# Altium PCB CORE.PcbDoc
Units mil, origin at the board's own origin, x right, y up, seen from the top; angles counter-clockwise.
Board outline 6000 x 4000 mil, 2 copper layers (Top Layer, Bottom Layer); 59 components, 78 nets, 393 pads, 24 vias.
Unrouted connection lines stored in the file: 234.
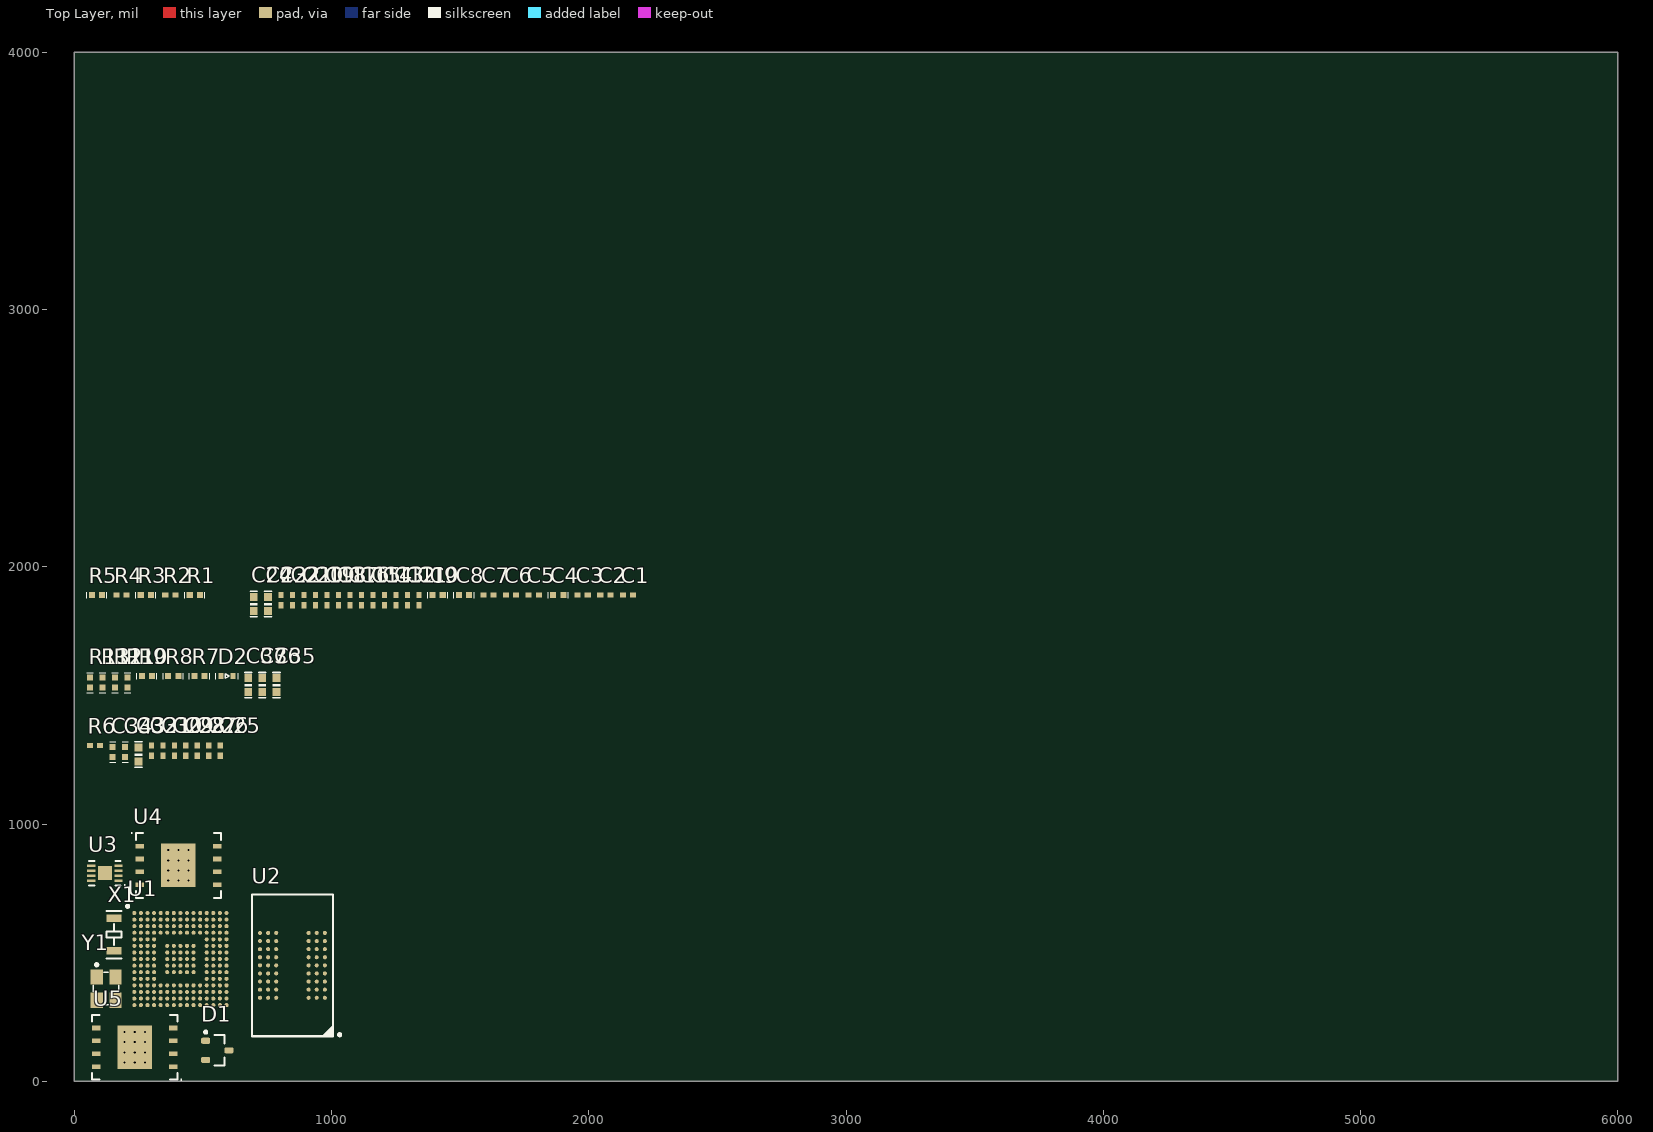
[diagram p0: Top Layer view]
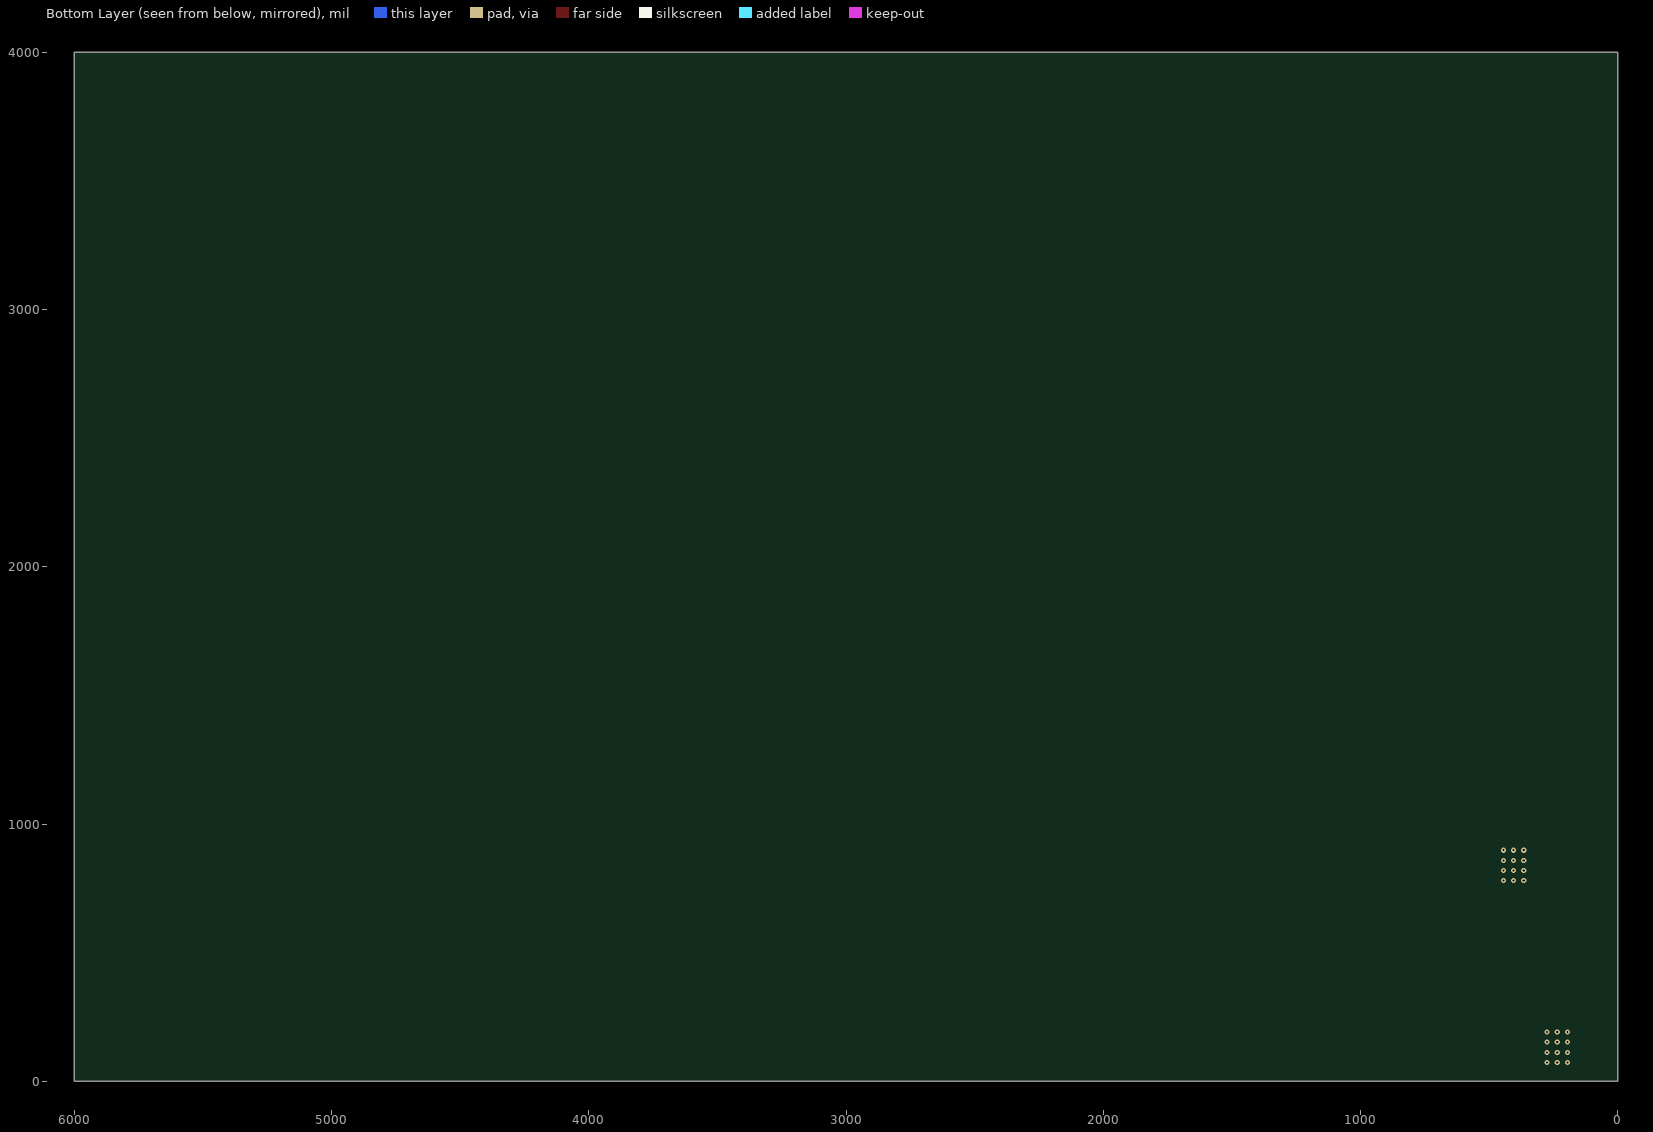
[diagram p1: Bottom Layer view, seen from below]

## Layer stack, top to bottom
Top Solder: solder mask 0.4, Solder Resist, Dk 3.5
Top Layer: signal copper 1.4
Dielectric 1: dielectric 12.6, FR-4, Dk 4.8
Bottom Layer: signal copper 1.4
Bottom Solder: solder mask 0.4, Solder Resist, Dk 3.5

## Board outline
0,0 6000,0 6000,4000 0,4000

## Design rules (kind name [scope] priority, off if disabled: settings)
Clearance POLY-VIA [IsVia vs InPoly] p1: gap=6 ignorepadtopadclearanceinfootprint=FALSE except(0: Arc-Hole Track-Hole SMDPad-Hole THPad-Hole Via-Hole Fill-Hole Poly-Hole Region-Hole Text-Hole)
Clearance POLY [InPoly] p2: gap=10 ignorepadtopadclearanceinfootprint=FALSE except(0: Arc-Hole Track-Hole SMDPad-Hole THPad-Hole Via-Hole Fill-Hole Poly-Hole Region-Hole Text-Hole)
Clearance [All] p3: gap=6 ignorepadtopadclearanceinfootprint=FALSE except(0: Arc-Hole Track-Hole SMDPad-Hole THPad-Hole Via-Hole Fill-Hole Poly-Hole Region-Hole Text-Hole)
HoleSize [All] p1: absolutevalues=TRUE maxlimit=200 minlimit=1 maxpercent=80.000 minpercent=20.000
PlaneClearance [All] p1: clearance=10
PlaneConnect [All] p1: planeconnectstyle=Relief reliefexpansion=6 reliefentries=4 reliefconductorwidth=10 reliefairgap=8
PolygonConnect VIA-POLY [IsVia] p1: connectstyle=Direct reliefconductorwidth=10 reliefentries=4 polygonreliefangle="90 Angle" airgapwidth=10
PolygonConnect [All] p2: connectstyle=Relief reliefconductorwidth=10 reliefentries=4 polygonreliefangle="90 Angle" airgapwidth=10
RoutingVias [All] p1: holewidth=13 width=26 viastyle="Through Hole" minholewidth=12 minwidth=22 maxholewidth=28 maxwidth=50
SilkToSilkClearance [All] p1 off: silktosilkclearance=10
SilkToSolderMaskClearance [IsPad] p1 off: minsilkscreentomaskgap=10 clearancetoexposedcopper=TRUE
SolderMaskExpansion [All] p1: expansion=2.5 istentingtop=FALSE
Width Width_6 [InNetClass('SDRAM_ADDRESS')] p1: maxlimit=10 minlimit=6 preferedwidth=10 bottomlayer_prefwidth=8 minimp=50.000000 maximp=50.000000 favimp=50.000000
Width Width_5 [InNetClass('LCD')] p2: maxlimit=10 minlimit=6 preferedwidth=8 minimp=50.000000 maximp=50.000000 favimp=50.000000
Width Width_4 [InNetClass('FLASH_ADDRESS')] p3: maxlimit=10 minlimit=6 preferedwidth=8 minimp=50.000000 maximp=50.000000 favimp=50.000000
Width Width_3 [InNetClass('SDRAM_DATA')] p4: maxlimit=10 minlimit=6 preferedwidth=6 minimp=50.000000 maximp=50.000000 favimp=50.000000
Width Width_2 [InNet('VCC_3.3V')] p5: maxlimit=30 minlimit=6 preferedwidth=10 minimp=50.000000 maximp=50.000000 favimp=50.000000
Width Width_1 [InNet('VCC_5V')] p6: maxlimit=30 minlimit=8 preferedwidth=10 minimp=50.000000 maximp=50.000000 favimp=50.000000
Width [All] p7: maxlimit=30 minlimit=6 preferedwidth=10 minimp=50.000000 maximp=50.000000 favimp=50.000000
25 further rules are at their usual default settings.

## Classes and differential pairs
component class STM32_H750_POWER: C1 C2 C3 C4 C5 C6 C7 C8 C9 C10 C11 C12 C13 C14 C15 C16 C17 C18 C19 C20 C21 C22 C23 C24 D1 R1 R2 R3 R4 R5 Y1
component class STM32_H750_IO2: C35 C36 C37 D2 R7 R8 R9 R10 R11 R12 R13 U3 U4 U5
component class STM32_H750_IO1: C25 C26 C27 C28 C29 C30 C31 C32 C33 C34 R6 U1 U2 X1

## Components (designator, comment, footprint, x,y, rotation, side; value= is the part's Value field where it differs from the comment)
C1 "0.1uF" 0402#1 2152.44,1890 r0 top
C2 "0402-C" 0402#1 2064.45,1890 r0 top
C3 "0402-C" 0402#1 1976.46,1890 r0 top
C4 "0.1uF" 0402#2 1861.63,1890 r0 top
C5 "0402-C" 0402#1 1786.17,1890 r0 top
C6 "0402-C" 0402#1 1698.17,1890 r0 top
C7 "0402-C" 0402#1 1610.18,1890 r0 top
C8 "22pF" 0402#2 1495.35,1890 r0 top
C9 "22pF" 0402#2 1393.05,1890 r0 top
C10 "0402-C" 0402#1 1339.24,1870 r90 top
C11 "0402-C" 0402#1 1294.56,1870 r90 top
C12 "0402-C" 0402#1 1249.88,1870 r90 top
C13 "0402-C" 0402#1 1205.19,1870 r90 top
C14 "0402-C" 0402#1 1160.51,1870 r90 top
C15 "0402-C" 0402#1 1115.82,1870 r90 top
C16 "0402-C" 0402#1 1071.14,1870 r90 top
C17 "0402-C" 0402#1 1026.45,1870 r90 top
C18 "0402-C" 0402#1 981.77,1870 r90 top
C19 "0402-C" 0402#1 937.08,1870 r90 top
C20 "0402-C" 0402#1 892.39,1870 r90 top
C21 "0402-C" 0402#1 847.71,1870 r90 top
C22 "0402-C" 0402#1 803.03,1870 r90 top
C23 "0603-C_Min" "0603P - 2" 753.12,1855 r90 top
C24 "0603-C_Min" "0603P - 2" 698.05,1855 r90 top
C25 "0.1uF" 0402#1 567.44,1285 r90 top
C26 "0.1uF" 0402#1 522.76,1285 r90 top
C27 "0.1uF" 0402#1 478.07,1285 r90 top
C28 "0.1uF" 0402#1 433.39,1285 r90 top
C29 "0.1uF" 0402#1 388.7,1285 r90 top
C30 "0.1uF" 0402#1 344.02,1285 r90 top
C31 "0.1uF" 0402#1 299.33,1285 r90 top
C32 "2.2uF" "0603P - 2" 249.43,1270 r90 top
C33 "0402-C" 0402#2 197.61,1260 r90 top
C34 "0402-C" 0402#2 148.99,1260 r90 top
C35 "2.2uF" "0603P - 2" 786.13,1540 r90 top
C36 "2.2uF" "0603P - 2" 731.07,1540 r90 top
C37 "2.2uF" "0603P - 2" 676.01,1540 r90 top
D1 "BAT54C" SOT23-3 556,120 r0 top
D2 "0402_LED" "0402 - LED" 569.54,1575 r0 top
R1 "10K" 0402#2 448.74,1890 r0 top
R2 "0R" 0402#1 373.28,1890 r0 top
R3 "10K" 0402#2 258.44,1890 r0 top
R4 "0R" 0402#1 182.98,1890 r0 top
R5 "10K" 0402#2 68.15,1890 r0 top
R6 "0R" 0402#1 80.68,1305 r0 top
R7 "10K" 0402#2 467.24,1575 r0 top
R8 "10K" 0402#2 364.94,1575 r0 top
R9 "10K" 0402#2 262.64,1575 r0 top
R10 "4.7K" 0402#2 206.87,1530 r90 top
R11 "4.7K" 0402#2 158.24,1530 r90 top
R12 "10K" 0402#2 109.62,1530 r90 top
R13 "0402-R" 0402#2 61,1530 r90 top
U1 "STM32H750IB_UFBGA176+25" STM32H750IB_UFBGA176+25 412.46,475 r0 top
U2 "MT48LC16M16A2" BGA-54-L 847.99,450.49 r180 top
U3 "m24xxx" DFN-8 119,809 r180 top
U4 "W25Qxx_WSON8" WSON-8 404.61,839 r0 top
U5 "W25Qxx_WSON8" WSON-8 235,132 r180 top
X1 "XTAL_32.768" XTAL3215 154,632.98 r270 top
Y1 "25Mhz" XTAL3225 87.17,405.55 r270 top

## Footprints (in the part's own frame and the unit in brackets; to place one, negate y for a bottom-side part, rotate by r counter-clockwise, add the part's x,y. Pads: shape width x height; smd on the part's side, far side on the other; paste and mask are expansions set on the pad)
0402#1 [mm] "Chip Capacitor, Body 1.0x0.5mm, IPC High Density"
  rect 0.6x0.5 smd: 1(-0.5,0) 2(0.5,0)
  body extent -0.55,-0.3 0.55,0.3, height 1.3
0402#2 [mm]
  rect 0.6x0.6 smd: 1(0,0) 2(1,0)
  silkscreen extent -0.5,-0.3 1.5,0.3
"0402 - LED" [mm]
  rect 0.5x0.6 smd: 1(0,0) 2(1.219,0)
  silkscreen extent -0.5,-0.3 1.7,0.3
"0603P - 2" [mil]
  rect 30x30 smd: 1(-27,0) 2(27.5,-0.06)
  silkscreen extent -49,-15 49,15
BGA-54-L [mm]
  round 0.4 smd: A1(-3.2,3.2) A2(-2.4,3.2) A3(-1.6,3.2) A7(1.6,3.2) A8(2.4,3.2) A9(3.2,3.2) B1(-3.2,2.4) B2(-2.4,2.4) B3(-1.6,2.4) B7(1.6,2.4) B8(2.4,2.4) B9(3.2,2.4) C1(-3.2,1.6) C2(-2.4,1.6) C3(-1.6,1.6) C7(1.6,1.6) C8(2.4,1.6) C9(3.2,1.6) D1(-3.2,0.8) D2(-2.4,0.8) D3(-1.6,0.8) D7(1.6,0.8) D8(2.4,0.8) D9(3.2,0.8) E1(-3.2,0) E2(-2.4,0) E3(-1.6,0) E7(1.6,0) E8(2.4,0) E9(3.2,0) F1(-3.2,-0.8) F2(-2.4,-0.8) F3(-1.6,-0.8) F7(1.6,-0.8) F8(2.4,-0.8) F9(3.2,-0.8) G1(-3.2,-1.6) G2(-2.4,-1.6) G3(-1.6,-1.6) G7(1.6,-1.6) G8(2.4,-1.6) G9(3.2,-1.6) H1(-3.2,-2.4) H2(-2.4,-2.4) H3(-1.6,-2.4) H7(1.6,-2.4) H8(2.4,-2.4) H9(3.2,-2.4) J1(-3.2,-3.2) J2(-2.4,-3.2) J3(-1.6,-3.2) J7(1.6,-3.2) J8(2.4,-3.2) J9(3.2,-3.2)
  silkscreen extent -4.78,-7 4,7, body extent -4,-7 4,7, height 1.2
DFN-8 [mm]
  rect 0.8x0.25 smd: 1(-1.345,0.75) 2(-1.345,0.25) 3(-1.345,-0.25) 4(-1.345,-0.75) 5(1.345,-0.75) 6(1.345,-0.25) 7(1.345,0.25) 8(1.345,0.75)
  rect 1.4x1.4 smd: 9(0,0)
  silkscreen extent -2,-1.2 1.55,1.25, body extent -1.55,-1.05 1.55,1.05, height 0.6
SOT23-3 [mm]
  rrect50% 0.9x0.6 smd: 1(-1.15,0.95) 2(-1.15,-0.95) 3(1.15,0)
  silkscreen extent -1.27,-1.5 0.7,1.92, body extent -0.7,-1.5 0.7,1.5, height 1.1
STM32H750IB_UFBGA176+25 [mm] "BGA, 205-Leads, Body 10.00x10.00mmx0.60mm, Pitch 0.65mm"
  round 0.4 smd: A1(-4.55,4.55) A2(-3.9,4.55) A3(-3.25,4.55) A4(-2.6,4.55) A5(-1.95,4.55) A6(-1.3,4.55) A7(-0.65,4.55) A8(0,4.55) A9(0.65,4.55) A10(1.3,4.55) A11(1.95,4.55) A12(2.6,4.55) A13(3.25,4.55) A14(3.9,4.55) A15(4.55,4.55) B1(-4.55,3.9) B2(-3.9,3.9) B3(-3.25,3.9) B4(-2.6,3.9) B5(-1.95,3.9) B6(-1.3,3.9) B7(-0.65,3.9) B8(0,3.9) B9(0.65,3.9) B10(1.3,3.9) B11(1.95,3.9) B12(2.6,3.9) B13(3.25,3.9) B14(3.9,3.9) B15(4.55,3.9) C1(-4.55,3.25) C2(-3.9,3.25) C3(-3.25,3.25) C4(-2.6,3.25) C5(-1.95,3.25) C6(-1.3,3.25) C7(-0.65,3.25) C8(0,3.25) C9(0.65,3.25) C10(1.3,3.25) C11(1.95,3.25) C12(2.6,3.25) C13(3.25,3.25) C14(3.9,3.25) C15(4.55,3.25) D1(-4.55,2.6) D2(-3.9,2.6) D3(-3.25,2.6) D4(-2.6,2.6) D5(-1.95,2.6) D6(-1.3,2.6) D7(-0.65,2.6) D8(0,2.6) D9(0.65,2.6) D10(1.3,2.6) D11(1.95,2.6) D12(2.6,2.6) D13(3.25,2.6) D14(3.9,2.6) D15(4.55,2.6) E1(-4.55,1.95) E2(-3.9,1.95) E3(-3.25,1.95) E4(-2.6,1.95) E12(2.6,1.95) E13(3.25,1.95) E14(3.9,1.95) E15(4.55,1.95) F1(-4.55,1.3) F2(-3.9,1.3) F3(-3.25,1.3) F4(-2.6,1.3) F6(-1.3,1.3) F7(-0.65,1.3) F8(0,1.3) F9(0.65,1.3) F10(1.3,1.3) F12(2.6,1.3) F13(3.25,1.3) F14(3.9,1.3) F15(4.55,1.3) G1(-4.55,0.65) G2(-3.9,0.65) G3(-3.25,0.65) G4(-2.6,0.65) G6(-1.3,0.65) G7(-0.65,0.65) G8(0,0.65) G9(0.65,0.65) G10(1.3,0.65) G12(2.6,0.65) G13(3.25,0.65) G14(3.9,0.65) G15(4.55,0.65) H1(-4.55,0) H2(-3.9,0) H3(-3.25,0) H4(-2.6,0) H6(-1.3,0) H7(-0.65,0) H8(0,0) H9(0.65,0) H10(1.3,0) H12(2.6,0) H13(3.25,0) H14(3.9,0) H15(4.55,0) J1(-4.55,-0.65) J2(-3.9,-0.65) J3(-3.25,-0.65) J4(-2.6,-0.65) J6(-1.3,-0.65) J7(-0.65,-0.65) J8(0,-0.65) J9(0.65,-0.65) J10(1.3,-0.65) J12(2.6,-0.65) J13(3.25,-0.65) J14(3.9,-0.65) J15(4.55,-0.65) K1(-4.55,-1.3) K2(-3.9,-1.3) K3(-3.25,-1.3) K4(-2.6,-1.3) K6(-1.3,-1.3) K7(-0.65,-1.3) K8(0,-1.3) K9(0.65,-1.3) K10(1.3,-1.3) K12(2.6,-1.3) K13(3.25,-1.3) K14(3.9,-1.3) K15(4.55,-1.3) L1(-4.55,-1.95) L2(-3.9,-1.95) L3(-3.25,-1.95) L4(-2.6,-1.95) L12(2.6,-1.95) L13(3.25,-1.95) L14(3.9,-1.95) L15(4.55,-1.95) M1(-4.55,-2.6) M2(-3.9,-2.6) M3(-3.25,-2.6) M4(-2.6,-2.6) M5(-1.95,-2.6) M6(-1.3,-2.6) M7(-0.65,-2.6) M8(0,-2.6) M9(0.65,-2.6) M10(1.3,-2.6) M11(1.95,-2.6) M12(2.6,-2.6) M13(3.25,-2.6) M14(3.9,-2.6) M15(4.55,-2.6) N1(-4.55,-3.25) N2(-3.9,-3.25) N3(-3.25,-3.25) N4(-2.6,-3.25) N5(-1.95,-3.25) N6(-1.3,-3.25) N7(-0.65,-3.25) N8(0,-3.25) N9(0.65,-3.25) N10(1.3,-3.25) N11(1.95,-3.25) N12(2.6,-3.25) N13(3.25,-3.25) N14(3.9,-3.25) N15(4.55,-3.25) P1(-4.55,-3.9) P2(-3.9,-3.9) P3(-3.25,-3.9) P4(-2.6,-3.9) P5(-1.95,-3.9) P6(-1.3,-3.9) P7(-0.65,-3.9) P8(0,-3.9) P9(0.65,-3.9) P10(1.3,-3.9) P11(1.95,-3.9) P12(2.6,-3.9) P13(3.25,-3.9) P14(3.9,-3.9) P15(4.55,-3.9) R1(-4.55,-4.55) R2(-3.9,-4.55) R3(-3.25,-4.55) R4(-2.6,-4.55) R5(-1.95,-4.55) R6(-1.3,-4.55) R7(-0.65,-4.55) R8(0,-4.55) R9(0.65,-4.55) R10(1.3,-4.55) R11(1.95,-4.55) R12(2.6,-4.55) R13(3.25,-4.55) R14(3.9,-4.55) R15(4.55,-4.55)
  silkscreen extent -5.33,5.09 -5.09,5.33, body extent -5,-5 5,5, height 0.6
WSON-8 [mm] "Winbond QSPI chip"
  rect 0.85x0.45 smd: 1(-3.82,1.905) 2(-3.82,0.635) 3(-3.82,-0.635) 4(-3.82,-1.905) 5(3.82,-1.905) 6(3.82,-0.635) 7(3.82,0.635) 8(3.82,1.905)
  rect 3.4x4.3 smd paste-1.7: 9(0,0)
  silkscreen extent -4.65,-3.2 4.2,3.25, body extent -4.05,-3.05 4.05,3.05, height 0.8
XTAL3215 [mm]
  rect 0.75x1.5 smd: 1(0,0) 2(3.2,0)
  silkscreen extent -0.74,-0.75 3.94,0.75
XTAL3225 [mm]
  rect 1.5x1.2 smd: 1(0,0) 2(2.3,0) 3(2.3,1.85) 4(0,1.854)
  silkscreen extent -1.33,-0.33 2.74,2.17

## Part data
C1 C4 C8 C9 C25 C26 C27 C28 C29 C30 C31: library part 0402-C
C32 C35 C36 C37: library part 0603-C_Min
D1: "双肖特基二极管"
R1 R2 R3 R4 R5 R6 R7 R8 R9 R10 R11 R12: library part 0402-R
U2: "32MB SDRAM"
U3: "ST EEPROM"
X1: "32.768晶振"
Y1: library part XTAL_3225, "3225贴片无源晶振"
U1: ComponentLink1Description="New link"

## Via types
v1: diameter 19.68, hole 7.87, Top Layer to Bottom Layer, 24 vias

## Nets (pads, with @x,y where several pads share a name; then routed paths per layer and width w, separated by ;. In a path a pad name is that pad's centre, name@x,y a point inside that pad or via, vN(x,y) a via of type N, cw(c..) or ccw(c..) an arc to the next point about the centre after c; other vN are vias at no path point)
BOOT0: R3.1 U1.D6
EEPROM_IIC_SCL: R10.1 U1.A5 U1.B6 U3.6
EEPROM_IIC_SDA: R11.1 U1.B5 U3.5
FMC_A0: U1.E2 U2.H7
FMC_A1: U1.H3 U2.H8
FMC_A2: U1.H2 U2.J8
FMC_A3: U1.J2 U2.J7
FMC_A4: U1.J3 U2.J3
FMC_A5: U1.K3 U2.J2
FMC_A6: U1.P6 U2.H3
FMC_A7: U1.N6 U2.H2
FMC_A8: U1.R7 U2.H1
FMC_A9: U1.P7 U2.G3
FMC_A10: U1.N7 U2.H9
FMC_A11: U1.M7 U2.G2
FMC_A12: U1.L15 U2.G1
FMC_BA0: U1.K14 U2.G7
FMC_BA1: U1.K13 U2.G8
FMC_D0: U1.M14 U2.A8
FMC_D1: U1.L14 U2.B9
FMC_D2: U1.B12 U2.B8
FMC_D3: U1.C12 U2.C9
FMC_D4: U1.R8 U2.C8
FMC_D5: U1.P8 U2.D9
FMC_D6: U1.P9 U2.D8
FMC_D7: U1.R9 U2.E9
FMC_D8: U1.P10 U2.E1
FMC_D9: U1.R10 U2.D2
FMC_D10: U1.N11 U2.D1
FMC_D11: U1.P11 U2.C2
FMC_D12: U1.R11 U2.C1
FMC_D13: U1.P15 U2.B2
FMC_D14: U1.P14 U2.B1
FMC_D15: U1.N15 U2.A2
FMC_NBL0: U1.A4 U2.E8
FMC_NBL1: U1.A3 U2.F1
FMC_SDCKE0: U1.F4 U2.F3
FMC_SDCLK: U1.H14 U2.F2
FMC_SDNCAS: U1.B7 U2.F7
FMC_SDNE0: U1.G4 U2.G9
FMC_SDNRAS: U1.R6 U2.F8
FMC_SDNWE: U1.J4 U2.F9
GND: C1.2 C2.1 C3.2 C4.1 C5.1 C5.2 C6.1 C7.1 C8.2 C9.2 C10.1 C10.2 C11.1 C11.2 C12.1 C12.2 C13.1 C13.2 C14.1 C14.2 C15.1 C15.2 C16.1 C16.2 C17.1 C17.2 C18.1 C18.2 C19.1 C19.2 C20.1 C20.2 C21.1 C21.2 C22.1 C22.2 C23.1 C23.2 C24.1 C24.2 C25.1 C25.2 C26.1 C26.2 C27.1 C27.2 C28.1 C28.2 C29.1 C29.2 C30.1 C30.2 C31.1 C31.2 C32.1 C32.2 C33.2 C34.2 C35.2 C36.1 C36.2 C37.1 C37.2 D1.1 D2.2 R1.2 R3.2 R5.1 R6.1 R7.2 R8.2 R10.2 R11.2 R12.2 U1.C5 U1.C7 U1.C8 U1.C9 U1.D5 U1.D7 U1.D8 U1.D9 U1.F2 U1.F3 U1.F6 U1.F7 U1.F8 U1.F9 U1.F10 U1.F12 U1.G2 U1.G3 U1.G6 U1.G7 U1.G8 U1.G9 U1.G10 U1.G12 U1.G13 U1.H6 U1.H7 U1.H8 U1.H9 U1.H10 U1.H12 U1.H13 U1.J6 U1.J7 U1.J8 U1.J9 U1.J10 U1.J12 U1.J13 U1.K4 U1.K6 U1.K7 U1.K8 U1.K9 U1.K10 U1.L4 U1.M1 U1.M8 U1.M9 U1.N1 U1.N8 U1.N9 U1.N10 U2.A1 U2.A3 U2.A7 U2.A9 U2.B3 U2.B7 U2.C3 U2.C7 U2.D3 U2.D7 U2.E3 U2.E7 U2.J1 U2.J9 U3.1 U3.2 U3.3 U3.4 U3.7 U3.8 U4.4 U4.8 U5.4 U5.8 Y1.2 Y1.4
GPIO_LED: R13.1 U1.B4
M_SPI_CLK: U1.A10 U4.6
M_SPI_CS: R8.1 U1.A13 U4.1
M_SPI_MISO: U1.A9 U4.2
M_SPI_MOSI: U1.A6 U4.5
NetC1_1: C1.1 D1.3 U1.C1
NetC2_2: C2.2 U1.F13
NetC3_1: C3.1 U1.M10
NetC6_2: C6.2 R2.1 U1.P1
NetC7_2: C7.2 R4.1 U1.R1
NetC8_1: C8.1 U1.H1 Y1.3
NetC9_1: C9.1 U1.G1 Y1.1
NetC33_1: C33.1 U1.E1 X1.1
NetC34_1: C34.1 U1.F1 X1.2
NetC35_1: C35.1 R9.1
NetD2_1: D2.1 R13.2
NetR7_1: R7.1 U4.3
NetR9_2: R9.2 U4.7
NRST: C4.2 R1.1 U1.J1
PC12_NC: U1.A12
PDR_ON: R5.2 U1.C6
PE3_NC: U1.A1
PG13_NC: U1.A8
PG14_NC: U1.A7
QSPI_CLK: U1.M6 U5.6
QSPI_CS: R12.1 U1.R12 U5.1
QSPI_IO0: U1.L3 U5.5
QSPI_IO1: U1.L2 U5.2
QSPI_IO2: U1.A2 U5.3
QSPI_IO3: U1.K2 U5.7
SWD_CLK: U1.A14
SWD_IO: R6.2 U1.A15
VBAT: D1.2
VDDA_3V3: R4.2
VREF_3V3: R2.2
pads on no net: U1.A11 U1.B1 U1.B2 U1.B3 U1.B8 U1.B9 U1.B10 U1.B11 U1.B13 U1.B14 U1.B15 U1.C2 U1.C3 U1.C4 U1.C10 U1.C11 U1.C13 U1.C14 U1.C15 U1.D1 U1.D2 U1.D3 U1.D4 U1.D10 U1.D11 U1.D12 U1.D13 U1.D14 U1.D15 U1.E3 U1.E4 U1.E12 U1.E13 U1.E14 U1.E15 U1.F14 U1.F15 U1.G14 U1.G15 U1.H4 U1.H15 U1.J14 U1.J15 U1.K1 U1.K12 U1.K15 U1.L1 U1.L12 U1.L13 U1.M2 U1.M3 U1.M4 U1.M5 U1.M11 U1.M12 U1.M13 U1.M15 U1.N2 U1.N3 U1.N4 U1.N5 U1.N12 U1.N13 U1.N14 U1.P2 U1.P3 U1.P4 U1.P5 U1.P12 U1.P13 U1.R2 U1.R3 U1.R4 U1.R5 U1.R13 U1.R14 U1.R15 U2.E2 U3.9 U4.9 U5.9
copper on no net:
  other v1: 195.63,72.94 235,72.94 274.37,72.94 195.63,112.32 235,112.32 274.37,112.32 195.63,151.68 235,151.68 274.37,151.68 195.63,191.06 235,191.06 274.37,191.06 365.24,779.94 404.61,779.94 443.98,779.94 365.24,819.32 404.61,819.32 443.98,819.32 365.24,858.68 404.61,858.68 443.98,858.68 365.24,898.06 404.61,898.06 443.98,898.06